# Allegro board H3_PROTOTYPE_DDR3_16X2_V3_0_20141112D.brd
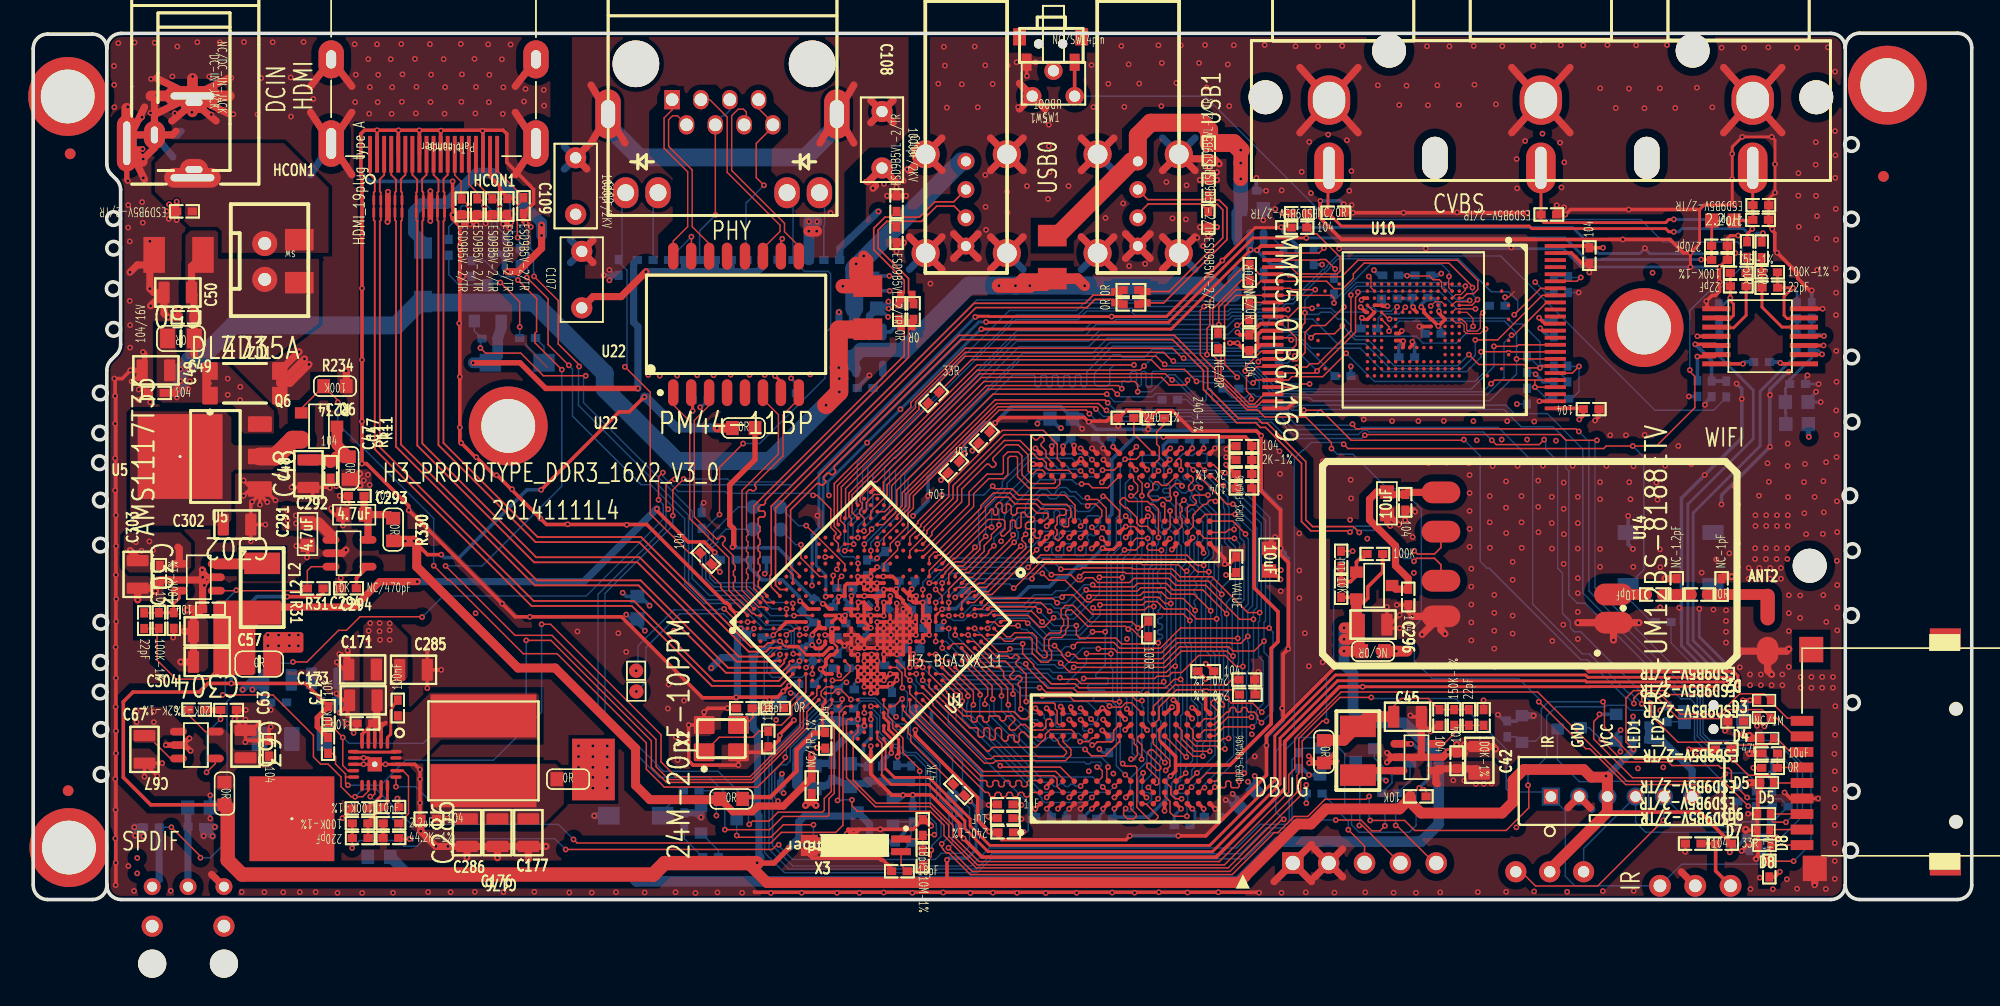
[diagram p0: board, top side]
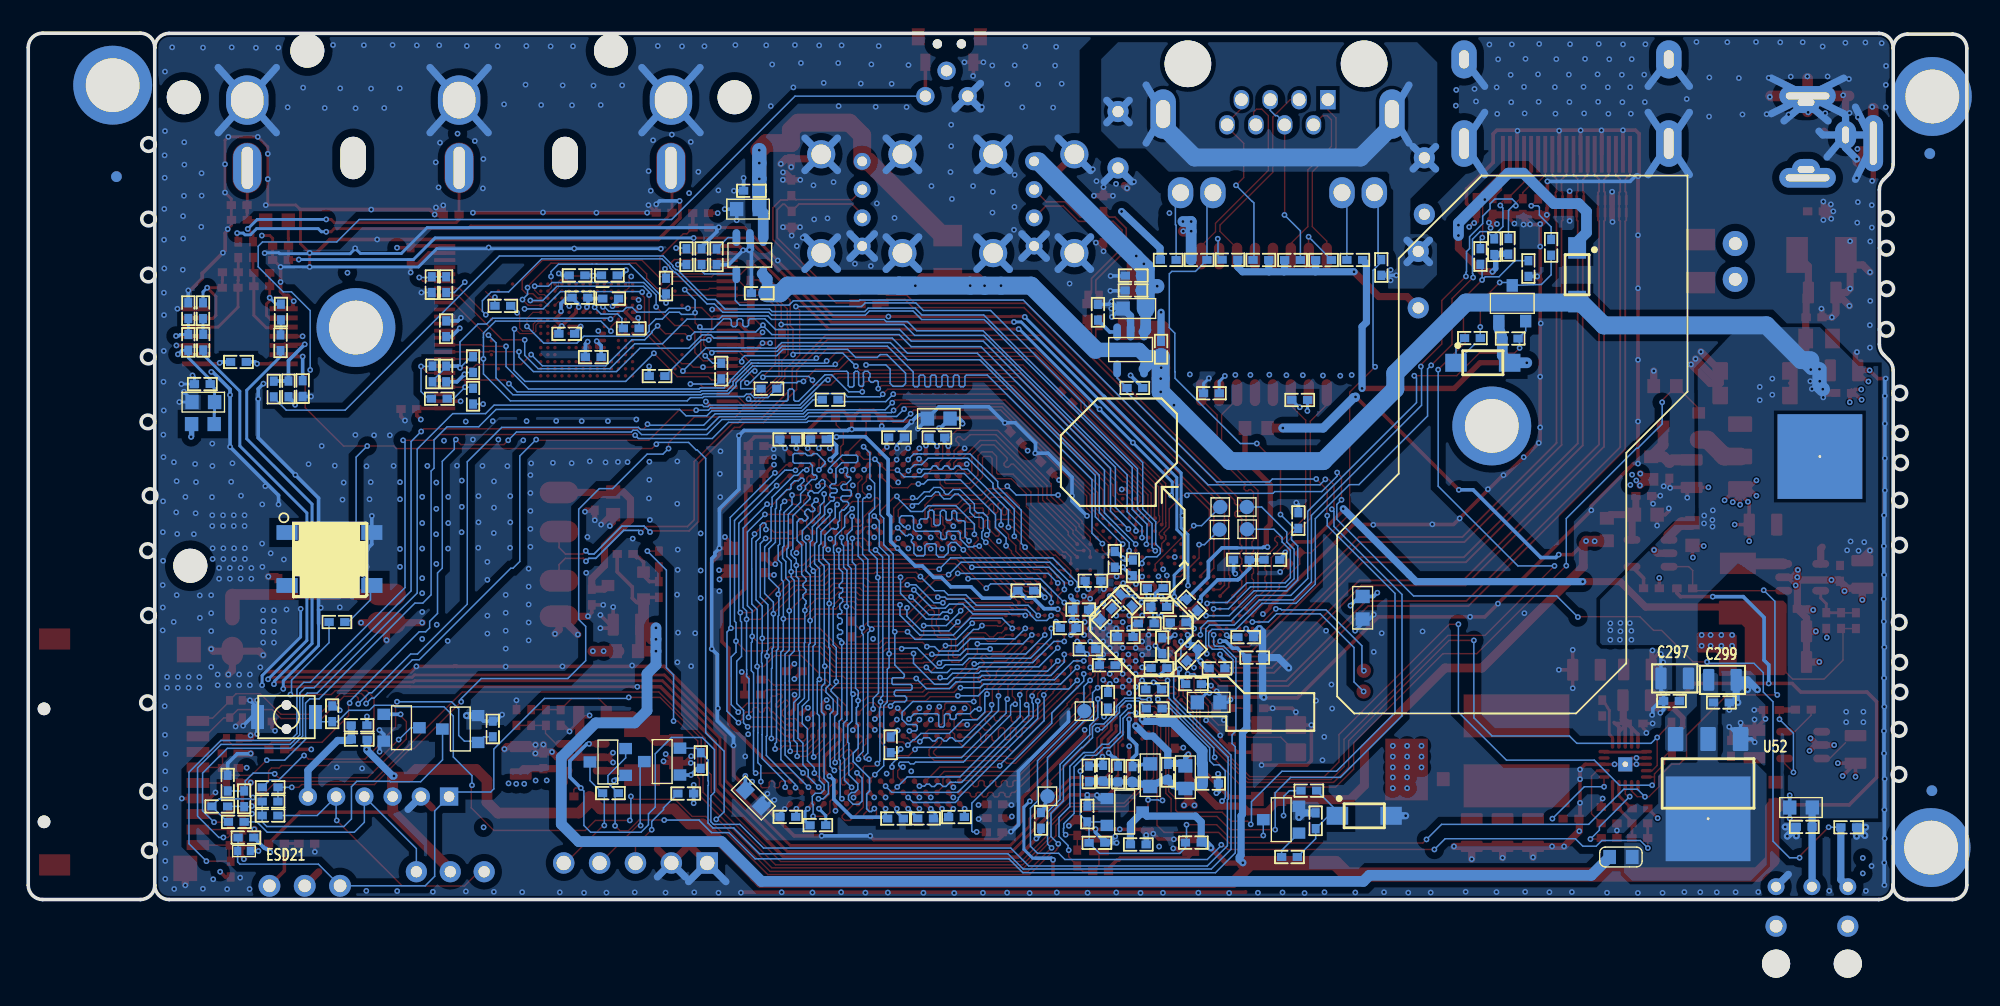
[diagram p1: board, bottom side, seen from below]

Outline 137.27 x 61.36 mm; copper layers: TOP, GND02, POWER03, BOTTOM. Coordinates in mm from the lower left corner of the outline.
Outline path: circle c4.69,30.94 r0.48 ; circle c4.71,33.04 r0.48 ; circle c4.74,14.7 r0.48 ; circle c4.74,35.88 r0.48 ; circle c4.75,16.8 r0.48 ; circle c4.75,28.29 r0.48 ; circle c4.76,25.1 r0.48 ; circle c4.79,19.64 r0.48 ; circle c4.8,12.05 r0.48 ; circle c4.81,8.86 r0.48 ; circle c5.67,43.27 r0.48 ; circle c5.69,48.23 r0.48 ; circle c5.69,46.13 r0.48 ; circle c5.7,40.38 r0.48 ; circle c128.64,28.6 r0.48 ; circle c128.7,3.48 r0.48 ; circle c128.75,48.2 r0.48 ; circle c128.75,53.48 r0.48 ; circle c128.75,20.12 r0.48 ; circle c128.76,44.23 r0.48 ; circle c128.77,38.42 r0.48 ; circle c128.8,33.83 r0.48 ; circle c128.81,7.66 r0.48 ; circle c128.82,24.71 r0.48 ; circle c128.82,13.94 r0.48 ; 5.21,0.92 5.21,0.96 ; 5.21,60.33 arc(5.51,61.05) 6.23,61.35 127.29,61.35 arc(128.01,61.05) 128.31,60.33 ; 5.21,1.02 5.21,37.49 arc(5.29,37.88) 5.51,38.21 5.9,38.59 arc(6.12,38.92) 6.19,39.31 6.19,50.27 arc(6.12,50.66) 5.9,50.99 5.51,51.38 arc(5.29,51.71) 5.21,52.1 5.21,60.28 arc(4.92,61) 4.2,61.3 1.02,61.3 arc(0.3,61) 0,60.28 0,1.02 arc(0.3,0.3) 1.02,0 4.2,0 arc(4.92,0.3) 5.22,1.02 ; 5.22,1.02 5.22,1.11 ; 5.21,1.02 arc(5.51,0.3) 6.23,0 127.29,0 arc(128.01,0.3) 128.31,1.02 ; 128.31,60.33 128.31,60.35 arc(128.61,61.07) 129.33,61.36 136.25,61.36 arc(136.97,61.07) 137.27,60.35 137.27,1.02 arc(136.97,0.3) 136.25,0 129.33,0 arc(128.61,0.3) 128.31,1.02 ; 128.31,60.33 128.31,1.02

## Design rules (mm)
net group EPHY-RX: nets EPHY-RXN EPHY-RXP
net group EPHY-TX: nets EPHY-TXN EPHY-TXP
net group HTX2: nets HTX2N HTX2P
net group N20732855: nets N20732855 N20732865
net group NRE: nets N20779991 NRE
net group PWR-LED: nets N21745537 PWR-LED
net group RX: nets N20822254 N20822256
net group STATUS-LED: nets N21745582 STATUS-LED
net group TX: nets N20822250 N20822252
net group USB3: nets USB-DM3 USB-DP3
net group USB-DM0: nets N20667309 USB-DM0
net group USB-DM1: nets N20518549 USB-DM1
net group USB-DP0: nets N20667301 USB-DP0
net group USB-DP1: nets N20518545 USB-DP1
net group VCC-IR: nets N21757117 VCC-IR
net group X24MO: nets N20772561 X24MO
net group DATA0: nets SDQ0 SDQ1 SDQ2 SDQ3 SDQ4 SDQ5 SDQ6 SDQ7 SDQM0 SDQS0N SDQS0P
net group DATA1: nets SDQ8 SDQ9 SDQ10 SDQ11 SDQ12 SDQ13 SDQ14 SDQ15 SDQM1 SDQS1N SDQS1P
net group DATA2: nets SDQ16 SDQ17 SDQ18 SDQ19 SDQ20 SDQ21 SDQ22 SDQ23 SDQM2 SDQS2N SDQS2P
net group DATA3: nets SDQ24 SDQ25 SDQ26 SDQ27 SDQ28 SDQ29 SDQ30 SDQ31 SDQM3 SDQS3N SDQS3P

## Placement (name value [footprint] x y rotation side)
ANT2  ANT  [ANT30]  122.82 18.74 270 top
C1  104  [C0402]  57.22 20.73 180 bottom
C2  104  [C0402]  54.84 17.31 315 bottom
C3  4.7uF  [C0402]  57.47 22.06 180 bottom
C4  104  [C0402]  56.08 11.27 90 top
C5  4.7uF  [C0402]  54.76 15.26 180 bottom
C6  104  [C0402]  53.09 16.37 0 bottom
C7  104  [C0402]  51.37 24.07 180 bottom
C8  104  [C0402]  54.86 20.87 225 bottom
C17  1uF  [C0402]  55.84 19.63 0 bottom
C18  104  [C0402]  56.97 17.98 90 bottom
C19  1uF  [C0402]  60.34 24.09 270 bottom
C20  104  [C0402]  59.05 23.49 270 bottom
C21  10uF  [C0603]  53.69 13.97 0 bottom
C22  1uF  [C0402]  57.2 16.39 0 bottom
C23  1uF  [C0402]  60.82 14.11 90 bottom
C24  104  [C0402]  60.86 16.59 180 bottom
C25  104  [C0402]  57.58 14.88 0 bottom
C26  10uF  [C0603]  42.78 20.67 90 bottom
C27  1uF  [C0402]  59.5 21.19 225 bottom
C28  1uF  [C0402]  59.59 18.6 180 bottom
C29  104  [C0402]  58.11 19.55 0 bottom
C30  104  [C0402]  60.95 20.21 135 bottom
C31  18pF  [C0402]  52.05 11.37 90 top
C32  10uF  [C0603]  57.83 8.81 90 bottom
C33  104  [C0402]  59.08 8.86 90 bottom
C34  4.7uF  [C0402]  61.16 8.95 90 bottom
C35  1uF  [C0402]  60.1 8.89 90 bottom
C36  104  [C0402]  50.43 17.13 0 bottom
C37  10uF  [C0603]  55.33 8.66 90 bottom
C38  104  [C0402]  56.58 9.02 90 bottom
C39  104  [C0402]  58.67 3.9 0 bottom
C40  104  [C0402]  62.28 6.06 270 bottom
C41  18pF  [C0402]  50.36 13.55 0 top
C42  10uF  [C0805]  102.4 9.86 90 top
C43  104  [C0402]  100.79 9.82 90 top
C44  22pF  [C0402]  101.66 12.89 90 top
C45  10uF  [C0805]  97.32 12.94 0 top
C46  104  [C0402]  99.58 12.89 270 top
C47  104  [C0402]  21.06 30.4 90 top
C48  10uF  [C0805]  19.49 30.17 90 top
C49  10uF  [C0805]  8.69 37.48 0 top
C50  10uF/16V  [C0805]  10.24 42.99 180 top
C51  104/16V  [C0402]  10.82 41.23 180 top
C55  104  [C0402]  8.97 23.1 270 top
C56  22pF  [C0402]  7.86 19.75 270 top
C57  22uF  [C0805]  12.32 18.99 180 top
C58  104  [C0402]  12.56 20.59 180 top
C62  104  [C0402]  16.7 10.71 270 top
C63  10uF  [C0805]  15.04 11.01 270 top
C67  10uF  [C0805]  7.88 10.63 90 top
C68  104  [C0402]  107.68 40.43 270 bottom
C69  104  [C0402]  110.19 45.61 90 top
C70  104  [C0402]  86.11 39.44 270 top
C71  104  [C0402]  110.32 34.74 180 top
C72  104  [C0402]  108.69 43.55 90 bottom
C75  1uF  [C0402]  99.14 40.07 0 bottom
C76  104  [C0402]  98.2 42.63 0 bottom
C77  1uF  [C0402]  96.03 42.56 180 bottom
C78  104  [C0402]  97.26 38.41 180 bottom
C79  1uF  [C0402]  90.66 45.53 90 bottom
C80  104  [C0402]  89.63 47.59 0 top
C81  10uF  [C0402]  122.97 10.35 0 top
C82  1uF  [C0402]  57.06 38.98 270 bottom
C83  104  [C0402]  59.04 43.14 180 bottom
C84  10uF  [C0603]  58.94 41.86 180 bottom
C85  104  [C0402]  85.5 42.94 180 bottom
C86  104  [C0402]  86.06 50.2 180 bottom
C87  10uF  [C0603]  86.3 48.9 180 bottom
C88  10pF  [C0402]  114.8 21.61 180 top
C89  10uF  [C0603]  95.85 28.06 90 top
C90  104  [C0402]  97.15 28.14 270 top
C91  NC-1.2pF  [C0402]  116.38 22.18 90 top
C92  NC-1pF  [C0402]  119.55 22.17 90 top
C93  22pF  [C0402]  120.73 43.44 180 top
C94  4.7uF  [C0402]  119.41 39.43 270 bottom
C95  1uF  [C0402]  122.38 38.08 0 bottom
C96  1uF  [C0402]  117.84 36.19 270 bottom
C97  10uF  [C0603]  124.87 35.23 180 bottom
C98  104  [C0402]  124.94 36.51 180 bottom
C99  4.7uF  [C0402]  124.88 39.48 270 bottom
C100  22pF  [C0402]  122.97 43.33 0 top
C101  270pF  [C0402]  119.4 46.3 180 top
C102  270pF  [C0402]  122.32 48.14 180 top
C103  NC/10uF  [C0603]  11.74 6.52 0 bottom
C104  104  [C0402]  117.55 3.96 0 top
C105  104  [C0402]  47.24 35.38 0 bottom
C106  104  [C0402]  53.49 35.86 0 bottom
C107  1000pF/2KV  [CAP_DIP_3X6]  38.84 43.91 270 top
C108  1000pF/2KV  [CAP_DIP_3X6]  60.1 53.81 270 top
C109  1000pF/2KV  [CAP_DIP_3X6]  38.41 50.54 270 top
C121  18pF  [C0402]  61.33 2 0 top
C130  18pF  [C0402]  62.99 5.1 270 top
C170  104  [C0402]  97.37 21.43 270 top
C171  10uF  [C0805]  23.32 16.3 180 top
C172  104  [C0402]  23.49 12.47 180 top
C173  10uF  [C0805]  23.38 14.11 180 top
C174  220pF  [C0402]  23.16 4.35 180 top
C175  104  [C0402]  28.02 5.73 0 top
C176  22uF  [C0805]  32.88 4.74 90 top
C177  22uF  [C0805]  35.06 4.74 90 top
C178  2.2uF  [C0402]  25.34 5.4 0 top
C179  10nF  [C0402]  23.14 6.45 0 top
C180  100nF  [C0402]  25.82 13.56 90 top
C284  104  [C0402]  8.72 35.88 0 top
C285  22uF  [C0805]  26.93 16.27 0 top
C286  10uF  [C0805]  30.72 4.74 90 top
C287  104  [C0402]  54.36 45.3 180 bottom
C288  104  [C0402]  41.46 44.77 90 bottom
C289  104  [C0402]  47.63 24.16 135 top
C290  104  [C0402]  47.33 26.84 270 bottom
C291  4.7uF  [C0603]  19.43 25.88 90 top
C292  4.7uF  [C0603]  22.73 27.26 0 top
C293  104  [C0402]  22.88 28.59 0 top
C294  NC/470pF  [C0402]  22.33 22.04 0 top
C295  1uF  [C0402]  92.62 21.96 90 top
C296  10uF  [C0805]  94.88 19.47 0 top
C297  10uF  [C0805]  20.68 15.66 180 bottom
C298  104  [C0402]  17.38 13.96 0 bottom
C299  10uF  [C0805]  17.31 15.56 0 bottom
C300  104  [C0402]  20.91 14.06 180 bottom
C301  NC/1uF  [C0402]  46.59 7.71 0 bottom
C302  10uF  [C0805]  14.43 26.56 180 top
C303  22uF  [C0805]  7.4 23.03 270 top
C304  22uF  [C0805]  12.33 16.83 180 top
C305  1uF  [C0402]  96.12 44.21 0 bottom
C306  104  [C0402]  98.41 44.21 180 bottom
D1  ESD9B5V-2/TR  [C0402]  10.72 48.74 180 top
D2  ESD9B5V-2/TR  [TVS0402]  122.56 14.11 180 top
D3  ESD9B5V-2/TR  [TVS0402]  122.55 12.88 180 top
D4  ESD9B5V-2/TR  [TVS0402]  122.78 11.42 180 top
D5  ESD9B5V-2/TR  [TVS0402]  122.77 8.28 180 top
D6  ESD9B5V-2/TR  [TVS0402]  122.56 6.08 180 top
D7  ESD9B5V-2/TR  [TVS0402]  122.52 4.9 180 top
D8  ESD9B5V-2/TR  [TVS0402]  122.6 3.84 180 top
D9  ESD9B5V-2/TR  [C0402]  59.03 44.19 0 bottom
D10  ESD9B5VL-2/TR  [C0402]  61.13 49.29 90 top
D11  ESD9B5VL-2/TR  [C0402]  61.13 47.09 270 top
D12  ESD9B5V-2/TR  [C0402]  83.24 53.03 270 top
D13  ESD9B5VL-2/TR  [C0402]  83.23 50.41 90 top
D14  ESD9B5VL-2/TR  [C0402]  83.21 48.18 270 top
D15  ESD9B5V-2/TR  [C0402]  107.32 48.52 180 top
D16  ESD9B5V-2/TR  [C0402]  92.24 48.65 180 top
D17  ESD9B5V-2/TR  [C0402]  122.33 49.18 180 top
D18  NC/ESD9B5V-2/TR  [C0402]  11.51 5.15 0 bottom
D30  NC/ESD9B5V-2/TR  [C0402]  8.36 5.12 180 bottom
D40  ESD9B5V-2/TR  [C0402]  30.35 49.06 270 top
D41  ESD9B5V-2/TR  [C0402]  33.57 49.09 270 top
D42  ESD9B5V-2/TR  [C0402]  32.51 49.07 270 top
D43  ESD9B5V-2/TR  [C0402]  34.72 49.15 270 top
D44  ESD9B5V-2/TR  [C0402]  31.44 49.08 270 top
D45  XBS104S14  [SOD123]  36.77 37.82 180 bottom
D46  XBS104S14  [SOD123]  27.8 46.75 270 bottom
D47  NC/ESD9B5V-2/TR  [C0402]  61.6 4.02 180 bottom
D48  NC/XBS104S14  [SOD123]  45.17 5.73 180 bottom
DC1  104  [C0402]  85.73 29.12 180 top
DC2  10uF  [C0603]  85.93 7.19 45 bottom
DC3  1uF  [C0402]  83.48 5.85 180 bottom
DC4  1uF  [C0402]  71.54 5.84 180 bottom
DC5  104  [C0402]  73.73 5.75 0 bottom
DC6  104  [C0402]  72.93 32.72 0 bottom
DC7  104  [C0402]  81.36 5.27 180 bottom
DC8  10uF  [C0603]  87.52 24.07 270 top
DC9  1uF  [C0402]  68.82 5.76 180 top
DC10  1uF  [C0402]  75.79 32.73 0 bottom
DC11  104  [C0402]  83.49 32.59 180 bottom
DC12  104  [C0402]  83.03 16.17 0 top
DC13  104  [C0402]  85.18 23.71 270 top
DC14  10uF  [C0603]  72.8 34.06 180 bottom
DC15  1uF  [C0402]  68.83 6.74 0 top
DC16  1uF  [C0402]  67.34 32.74 225 top
DC17  104  [C0402]  65.18 30.63 225 top
DC18  104  [C0402]  76.2 10.96 90 bottom
DC19  104  [C0402]  75.86 5.74 0 bottom
DC20  104  [C0402]  85.73 32.12 0 top
DC21  104  [C0402]  66.64 21.88 0 bottom
DC22  104  [C0402]  81.32 32.59 180 bottom
DC23  104  [C0402]  63.63 19.23 180 bottom
DC24  104  [C0402]  61.88 22.58 0 bottom
DC25  1uF  [C0402]  62.75 20.54 0 bottom
DC27  1uF  [C0402]  62.23 17.72 0 bottom
DR1  240-1%  [R0402]  79.55 34.1 0 top
DR2  240-1%  [R0402]  77.38 34.11 0 top
DR3  240-1%  [R0402]  85.97 14.52 180 top
DR4  240-1%  [R0402]  85.94 15.58 180 top
DR5  240-1%  [R0402]  68.87 4.76 180 top
DR6  2K-1%  [R0402]  85.73 30.14 180 top
DR7  2K-1%  [R0402]  85.73 31.13 0 top
DR8  100R  [R0402]  78.96 19.16 270 top
DU1  DDR3-FBGA96  [FBGA96C80P9X13]  77.32 28.4 90 top
DU2  DDR3-FBGA96  [FBGA96C80P9X13]  77.32 9.99 90 top
ESD21  NC/ESD9B5V-2/TR  [TVS0402]  121.99 3.44 180 bottom
FB1  0R  [L0603]  124.9 33.68 0 bottom
HCON1  HDMI_19plug type A  [HDMI-CON-HOLE]  28.35 64.1 180 top
J1  DC-IN-JACK  [DC-508]  11.13 50.77 270 top
J2  MICROSD/TF_SLOT  [TF9P]  136.15 10.45 90 top
J4  NC/SIP-7  [OPTICAL_JACK]  8.43 0.91 180 top
J6  CON2  [CON5]  99.35 2.59 180 top
J7  AV3-8.4-5  [RCA-316]  106.76 55.97 180 top
J8  RJ45A  [RJ-45B]  48.81 55.88 180 top
J9  CON6  [HDR6P2_00]  112.47 7.49 0 top
J10  NC/DC-IN-JACK  [DC-208]  11.39 51.7 270 top
L1  4.7uH@1.5A DCR<0.1R  [CD32]  93.8 10.54 90 top
L2  2.2uH@2A DCR<0.1R  [CD32]  16.21 22.09 270 top
L4  2.2uH  [L0603]  119.66 48.09 0 top
L5  2.2uH-6A  [CD75]  31.88 10.53 0 top
L13  NC/EXC14CE900U  [ESD4P0_8B1_6X3_0]  61.83 41.72 270 top
L14  NC/EXC14CE900U  [ESD4P0_8B1_6X3_0]  77.73 42.66 180 top
LED2  RED-BLUE-DUAL-LED-CA  [LED3P2_4B8_1X12_1]  107.39 1.97 0 top
NOREF  -  [unnamed]  2.44 56.88 0 top
NOREF#2  -  [unnamed#2]  2.62 52.82 0 top
NOREF#3  -  [unnamed#2]  2.48 7.71 0 top
NOREF#4  -  [unnamed]  2.53 3.68 0 top
NOREF#5  -  [#3]  5.19 60.34 0 top
NOREF#6  -  [unnamed#3]  125.79 23.64 0 top
NOREF#7  -  [unnamed]  114.07 40.51 0 top
NOREF#8  -  [#3]  -0.02 50.82 0 top
NOREF#9  -  [unnamed]  33.64 33.54 0 top
NOREF#10  -  [unnamed]  131.29 57.68 315 top
NOREF#11  -  [#3]  124.32 0.02 90 top
NOREF#12  -  [unnamed#2]  131.02 51.22 315 top
NOREF#13  -  [unnamed#2]  131.02 51.2 135 bottom
NOREF#14  -  [unnamed#2]  2.47 7.71 180 bottom
NOREF#15  -  [unnamed#2]  2.62 52.84 180 bottom
OC1  22uF-10V  [C1210]  10.29 45.66 180 top
P1  -  [USB_A_1]  66.05 46.28 180 top
P2  -  [USB_A_1]  78.22 46.28 180 top
Q2  NC-BSN20  [SOT-23]  96.22 9.74 0 bottom
Q3  BSN20  [SOT-23]  92.38 9.77 0 bottom
Q4  AO3423-PMOS  [SOT-23]  94.95 22.24 0 top
Q5  NC/MMBT3904  [SOT-23]  106.67 12.08 0 bottom
Q6  AO3423-PMOS  [SOT-23]  20.24 33.52 0 top
Q7  BSN20  [SOT-23]  32.19 42.23 90 bottom
Q8  NC/MMBT3904  [SOT-23]  110.84 12.17 180 bottom
Q9  NC/MMBT3904  [SOT-23]  48.55 5.65 0 bottom
R2  0R  [R0402]  65.56 5.61 270 bottom
R3  47K  [R0402]  65.54 7.77 135 top
R5  10K  [R0402]  54.77 4.03 180 bottom
R6  NC/1R-1%  [R0402]  55.13 8.07 90 top
R7  220K-1%  [R0402]  62.17 8.9 90 bottom
R8  0R  [R0402]  52.58 13.56 0 top
R9  0R  [R0402]  53.55 8.21 0 bottom
R10  0R  [R0603]  91.39 10.47 270 top
R11  0R  [R0603]  22.34 30.56 270 top
R12  150K-1%  [R0402]  100.62 12.89 90 top
R13  0R  [R0805]  10.46 39.74 180 top
R14  100K-1%  [R0402]  102.7 12.89 270 top
R16  100K-1%  [R0402]  8.9 19.76 270 top
R18  100K-1%  [R0402]  9.95 19.76 90 top
R20  NC/0R  [R0603]  94.88 17.59 180 top
R21  0R  [R0805]  16.01 16.68 0 top
R24  2R-1%  [R0402]  49.21 24.06 0 bottom
R25  0R  [R0603]  13.55 7.51 270 top
R27  62K-1%  [R0402]  11.58 13.45 180 top
R29  20K-1%  [R0402]  13.84 13.43 180 top
R31  10K  [R0402]  19.97 22.04 0 top
R32  10K  [R0402]  98.07 7.31 180 top
R33  0R  [R0603]  49.44 7.13 0 top
R34  0R  [R0603]  50.31 33.4 0 top
R35  10K  [R0402]  105.77 35.65 90 bottom
R36  0R-NC  [R0402]  108.16 35.47 0 bottom
R37  10K  [R0402]  107.68 43.55 90 bottom
R38  NC/0R  [R0402]  92.74 37.07 180 bottom
R39  NC/0R  [R0402]  108.64 37.23 270 bottom
R41  10K  [R0402]  105.77 37.89 90 bottom
R43  33R  [R0402]  63.76 35.55 45 top
R44  NC/0R  [R0402]  84.82 36.18 0 bottom
R45  NC/0R  [R0402]  86.11 41.63 90 top
R46  NC/0R  [R0402]  92.11 43.45 90 bottom
R47  NC/0R  [R0402]  88.2 37.43 270 bottom
R48  NC/0R  [R0402]  83.9 39.56 270 top
R49  NC/0R  [R0402]  86.14 44.41 270 top
R50  0R  [R0402]  122.95 9.32 0 top
R51  47K  [R0402]  119.67 10.63 0 top
R52  47K  [R0402]  122.93 2.16 90 top
R53  33R  [R0402]  80.49 35.4 0 bottom
R54  NC/1M  [R0402]  120.56 12.61 0 top
R55  100K  [R0402]  58.91 36.24 0 bottom
R56  6K8-1%  [R0402]  61.53 41.6 270 bottom
R57  100K  [R0402]  89.59 45.53 270 bottom
R58  6K8-1%  [R0402]  88.53 45.53 90 bottom
R59  0R  [R0402]  117.97 21.6 0 top
R60  100K-1%  [R0402]  120.73 44.39 180 top
R61  49.9K-1%  [R0402]  119.37 41.61 270 bottom
R62  50R  [R0402]  121.36 46.03 270 top
R63  4.7K  [R0402]  119.89 36.16 90 bottom
R64  4.7K  [R0402]  118.84 36.17 90 bottom
R65  3K  [R0402]  125.94 39.46 90 bottom
R66  2K  [R0402]  125.94 41.71 90 bottom
R67  49.9K-1%  [R0402]  124.89 41.7 270 bottom
R68  100K-1%  [R0402]  122.96 44.43 0 top
R69  50R  [R0402]  122.39 46.02 270 top
R70  75R-1%  [R0402]  119.41 45.3 0 top
R77  47K  [R0402]  115.75 13.15 90 bottom
R78  47K  [R0402]  115.41 19.66 0 bottom
R79  33R  [R0402]  119.69 3.96 0 top
R80  10K  [R0402]  121.85 4.39 180 bottom
R83  330R  [R0402]  43.34 45.3 0 bottom
R84  330R  [R0402]  56.55 45.3 180 bottom
R85  75R  [R0402]  45.55 45.3 0 bottom
R86  75R  [R0402]  47.75 45.3 0 bottom
R87  75R  [R0402]  49.99 45.3 180 bottom
R88  75R  [R0402]  52.18 45.32 180 bottom
R90  0R  [R0402]  96.05 7.53 0 bottom
R91  10K  [R0402]  89.64 9.85 90 bottom
R92  NC  [R0402]  90.71 7.51 0 bottom
R97  6K-1%  [R0402]  51.06 18.58 0 bottom
R99  NC/0R  [R0402]  89.66 48.62 0 top
R175  NC-0R  [R1206]  59.11 41.93 270 top
R176  0R  [R0402]  61.32 41.65 270 top
R226  100K  [R0402]  95 24.48 0 top
R227  10K  [R0402]  20.88 10.92 90 top
R228  10K  [R0402]  20.91 13.11 90 top
R229  100K-1%  [R0402]  23.15 5.4 180 top
R230  100K-1%  [R0402]  25.33 6.55 180 top
R231  0R  [R0603]  37.88 8.52 0 top
R232  44.2K-1%  [R0402]  25.33 4.36 0 top
R234  100K  [R0603]  21.37 36.36 180 top
R236  10M-1%  [R0402]  62.99 2.94 270 top
R306  0R  [R0402]  29.43 46.2 270 bottom
R307  20K  [R0402]  34.44 45.54 90 bottom
R308  27K  [R0402]  31.04 44.69 270 bottom
R309  1K8  [R0402]  33.46 46.24 270 bottom
R310  1K8  [R0402]  32.46 46.27 270 bottom
R311  27K  [R0402]  35.01 39.77 180 bottom
R312  27K  [R0402]  32.33 39.74 0 bottom
R320  NC/100K  [R0402]  123.15 8.24 90 bottom
R321  NC/100K  [R0402]  104.38 12.08 90 bottom
R322  330R  [R0402]  122.54 5.5 0 bottom
R323  330R  [R0402]  120.15 5.95 0 bottom
R324  NC/10K  [R0402]  121.98 7.13 90 bottom
R325  NC/10K  [R0402]  120.14 7.95 0 bottom
R326  0R  [R0402]  123.71 6.59 0 bottom
R327  0R  [R0402]  120.15 6.94 0 bottom
R328  0R  [R0402]  113.83 11.33 180 bottom
R329  NC/0R  [R0402]  113.85 12.34 0 bottom
R330  0R  [R0603]  25.49 26.21 270 top
R331  NC/0R  [R1206]  18.85 45.22 270 top
R332  NC-0R  [R1206]  72.17 45.51 270 top
R333  0R  [R0402]  62.34 41.65 270 top
R334  0R  [R0402]  77.73 43.17 180 top
R335  0R  [R0402]  77.73 42.15 180 top
R337  10K  [R0402]  92.62 24.12 270 top
R339  0R  [R0603]  24.49 3.01 0 bottom
R340  NC/10K  [R0402]  46.11 5.58 270 bottom
R341  10K  [R0402]  107.68 37.23 90 bottom
R342  NC  [R0402]  103.67 42.05 180 bottom
R343  NC  [R0402]  94.57 40.45 0 bottom
R344  100K  [R0402]  57.54 13.53 0 bottom
R345  NC/10K  [R0402]  47.96 3.01 180 bottom
SW1  NC/UBOOT  [SW_3P_DIP_SHORT]  72.25 57.8 180 top
SW2  UBOOT  [SW4-SKQG-5_2X5_2H1_5B]  115.94 24.12 180 bottom
TP1  VDD-CPUFB  [TP_SMD]  62.48 13.34 180 bottom
TP2  GND-CPUFB  [TP_SMD]  65.1 7.31 180 bottom
TP3  JTAG-SEL0  [TP_SMD]  42.69 16.21 0 top
TP4  JTAG-SEL1  [TP_SMD]  42.71 14.73 0 top
TP5  CPUX-TDI  [TP_SMD]  52.87 27.8 0 bottom
TP6  CPUX-TCK  [TP_SMD]  50.99 27.8 0 bottom
TP7  CPUX-TDO  [TP_SMD]  50.96 26.23 0 bottom
TP8  CPUX-TMS  [TP_SMD]  52.92 26.2 0 bottom
U1  H3-BGA3XX_11  [BGA347P0_65B14X14]  59.31 19.66 45 top
U3  SGM803Z  [SOT-23]  59.63 6.2 180 bottom
U4  SY8008B  [SOT23-5]  97.95 10.08 0 top
U5  AMS1117T33  [SOT-223]  12.9 31.38 90 top
U7  SY8089A  [SOT23-5]  11.72 22.82 180 top
U8  AP2127  [SOT23-5]  11.52 10.94 0 top
U10  EMMC5_0_BGA169  [BGA169P0_50B12_00X16_00H1_00]  97.73 40.34 270 top
U11  NC-NAND FLASH X8  [TSOP-48]  97.78 40.54 180 top
U12  SY6280  [SOT23-5]  59.22 38.95 270 bottom
U13  SY6280  [SOT23-5]  86.17 45.64 270 bottom
U14  RL-UM12BS-8188ETV  [SOP6P2_00B12_96X_22]  105.79 23.63 90 top
U15  SGM89000  [TSSOP14]  122.29 39.89 0 top
U19  rRClamp0524P  [RCLAMP0524P]  24.11 49.54 0 top
U20  rRClamp0524P  [RCLAMP0524P]  27.12 49.54 0 top
U21  IR_MODULE  [IR3P2_50B7_00X3_50]  117.69 0.97 180 top
U22  PM44-11BP  [SOP16P1_27B6_86X12_70H6_0]  49.77 40.74 0 top
U31  SY8106A  [QFN21P0_45B3_00X3_00H0_90]  24.19 9.58 270 top
U48  KEY-2PIN  [SW3X4_2P]  118.98 12.93 0 bottom
U49  RT9050-33GB  [SOT23-5]  22.33 24.53 0 top
U50  sw  [XH-2-2_54]  16.4 45.19 270 top
U51  NC/SW_4pin  [KEY6P3_40]  72.12 60.62 0 top
U52  AMS1117T33  [SOT-223]  18.32 8.22 0 bottom
X2  24M-20pF-10PPM  [CRY-TSX3225]  48.72 11.39 90 top
X3  32768  [IN-CRYSTAL_0206H1_4A]  58.2 3.84 180 top
ZD1  DL4735A  [MELF5_00X2_80]  14.99 36.57 0 top

## Library data of the parts
ANT2 = ANT_0
C1-C8 C17-C41 C68-C72 C75-C80 C88-C92 C104 C121 C130 C170 C287-C290 C295 C296 C301 C305 C306 DC1-DC25 DC27 = CAPACITOR_0
C42-C46 C50 C51 C55-C58 C171-C173 C285 C303 C304 = CAPACITOR_1
C47-C49 C62 C63 C67 C81-C87 C93-C96 C99-C103 C174-C180 C284 C286 C291-C294 C297-C300 C302 = CAPACITOR
C97 C98 = CAP NP
C105-C109 = CAP_1
D1-D18 D30 D40-D44 D47 ESD21 = 1_1.5KE100A
D45 D48 = DIODE_SCHOTTKY_1: Tolerance: RichardLC
D46 = DIODE_SCHOTTKY_2: Tolerance: RichardLC
DR1-DR5 DR8 R3 R6 R7 R10-R14 R16 R18 R20 R21 R24 R25 R27 R29 R31-R39 R41 R44-R49 R51-R58 R60-R62 R65-R69 R79 R80 R99 R175 R227-R232 R236 R307 R320-R325 R329-R332 R339 R341-R344 = R
DR6 DR7 = ?_0
DU1 DU2 = DDR3_1: Tolerance: RichardLC
FB1 = INDUCTOR_4
HCON1 = HDMI19_PLUG: User Part Number: Part number; Tolerance: Toleance
J1 J10 = PHONEJack_DCIN_0
J2 = SDMMC SLOT_11
J4 = SIP-7
J6 J9 = CON2_2
J7 = HEADER_1x4-2mm_0
J8 = LU1S041A_0
L1 L2 = INDUCTOR_1
L4 = INDUCTOR
L5 = INDUCTOR_5
L13 L14 = R-PACK4_1
LED2 = LED_1
OC1 = CAPACITOR_POL_0
P1 P2 = USB_A_1
Q2 Q3 Q7 = NMOS_0
Q4 Q6 = PMOS_0
Q5 Q8 Q9 = NPN
R2 R8 R9 R50 R59 R176 R326-R328 R333-R335 = R: signal model: R_R0402_0R_0R
R5 R63 R64 R77 R78 R340 R345 = R1 0805
R43 = R: signal model: R_R0402_33R_33R
R70 = RESISTOR: room: TVLCD
R83-R88 R97 R226 R234 R337 = R1_0805
R90-R92 = R1_0805: room: DRAM
R306 R308-R312 = RESISTOR
SW1 = SW-_0
SW2 = SW_PUSH: User Part Number: PRAT NUMBER; Tolerance: TOLERANCE
TP1-TP8 = T_POINT_R
U1 = H3-BGA3XX_12
U3 = MAX809RD_0
U4 U7 = SY8088
U5 U52 = AMS1117T33_2: Tolerance: RichardLC
U8 = uP0107_0
U10 = EMMC5_0_BGA169: Tolerance: RichardLC
U11 = NAND_FLASH_X8
U12 U13 = RT9266PE_2
U14 = MINI USB-B_5
U15 = SGM8900
U19 U20 = rRClamp0524P
U21 = IR_Module_0
U22 = J_0
U31 = SY8106a_0
U48 = KEY-2PIN
U49 = RT9050
U50 = sw
U51 = SW_4pin
X2 = CRYSTAL-4_0
X3 = CRYSTAL_XCOL-3_2: User Part Number: Part number; Tolerance: Toleance
ZD1 = DIODE_SCHOTTKY_3

## Footprints (pads in the part's own frame, mm; a bottom-side part is the same pattern mirrored in y, then rotated)
ANT30
  oval 2.6x1.02 smd: 1(-1.981,0)
  oval 2.032x1.524 smd: 2(1.143,0)
BGA169P0_50B12_00X16_00H1_00
  round 0.249 smd: A4(-1.75,6.749) A6(-0.749,6.749) A9(0.749,6.749) A11(1.75,6.749) AA1(-3.251,-3.251) AA2(-2.751,-3.251) AA3(-2.25,-3.251) AA4(-1.75,-3.251) AA5(-1.25,-3.251) AA6(-0.749,-3.251) AA7(-0.249,-3.251) AA8(0.249,-3.251) AA9(0.749,-3.251) AA10(1.25,-3.251) AA11(1.75,-3.251) AA12(2.25,-3.251) AA13(2.751,-3.251) AA14(3.251,-3.251) AE1(-3.251,-5.25) AE14(3.251,-5.25) AG2(-2.751,-6.251) AG13(2.751,-6.251) AH4(-1.75,-6.749) AH6(-0.749,-6.749) AH9(0.749,-6.749) AH11(1.75,-6.749) B2(-2.751,6.251) B13(2.751,6.251) D1(-3.251,5.25) D14(3.251,5.25) H1(-3.251,3.251) H2(-2.751,3.251) H3(-2.25,3.251) H4(-1.75,3.251) H5(-1.25,3.251) H6(-0.749,3.251) H7(-0.249,3.251) H8(0.249,3.251) H9(0.749,3.251) H10(1.25,3.251) H11(1.75,3.251) H12(2.25,3.251) H13(2.751,3.251) H14(3.251,3.251) J1(-3.251,2.751) J2(-2.751,2.751) J3(-2.25,2.751) J4(-1.75,2.751) J5(-1.25,2.751) J6(-0.749,2.751) J7(-0.249,2.751) J8(0.249,2.751) J9(0.749,2.751) J10(1.25,2.751) J11(1.75,2.751) J12(2.25,2.751) J13(2.751,2.751) J14(3.251,2.751) K1(-3.251,2.25) K2(-2.751,2.25) K3(-2.25,2.25) K4(-1.75,2.25) K5(-1.25,2.25) K6(-0.749,2.25) K7(-0.249,2.25) K8(0.249,2.25) K9(0.749,2.25) K10(1.25,2.25) K11(1.75,2.25) K12(2.25,2.25) K13(2.751,2.25) K14(3.251,2.25) L1(-3.251,1.75) L2(-2.751,1.75) L3(-2.25,1.75) L4(-1.75,1.75) L12(2.25,1.75) L13(2.751,1.75) L14(3.251,1.75) M1(-3.251,1.25) M2(-2.751,1.25) M3(-2.25,1.25) M5(-1.25,1.25) M6(-0.749,1.25) M7(-0.249,1.25) M8(0.249,1.25) M9(0.749,1.25) M10(1.25,1.25) M12(2.25,1.25) M13(2.751,1.25) M14(3.251,1.25) N1(-3.251,0.749) N2(-2.751,0.749) N3(-2.25,0.749) N5(-1.25,0.749) N10(1.25,0.749) N12(2.25,0.749) N13(2.751,0.749) N14(3.251,0.749) P1(-3.251,0.249) P2(-2.751,0.249) P3(-2.25,0.249) P5(-1.25,0.249) P10(1.25,0.249) P12(2.25,0.249) P13(2.751,0.249) P14(3.251,0.249) R1(-3.251,-0.249) R2(-2.751,-0.249) R3(-2.25,-0.249) R5(-1.25,-0.249) R10(1.25,-0.249) R12(2.25,-0.249) R13(2.751,-0.249) R14(3.251,-0.249) T1(-3.251,-0.749) T2(-2.751,-0.749) T3(-2.25,-0.749) T5(-1.25,-0.749) T10(1.25,-0.749) T12(2.25,-0.749) T13(2.751,-0.749) T14(3.251,-0.749) U1(-3.251,-1.25) U2(-2.751,-1.25) U3(-2.25,-1.25) U5(-1.25,-1.25) U6(-0.749,-1.25) U7(-0.249,-1.25) U8(0.249,-1.25) U9(0.749,-1.25) U10(1.25,-1.25) U12(2.25,-1.25) U13(2.751,-1.25) U14(3.251,-1.25) V1(-3.251,-1.75) V2(-2.751,-1.75) V3(-2.25,-1.75) V12(2.25,-1.75) V13(2.751,-1.75) V14(3.251,-1.75) W1(-3.251,-2.25) W2(-2.751,-2.25) W3(-2.25,-2.25) W4(-1.75,-2.25) W5(-1.25,-2.25) W6(-0.749,-2.25) W7(-0.249,-2.25) W8(0.249,-2.25) W9(0.749,-2.25) W10(1.25,-2.25) W11(1.75,-2.25) W12(2.25,-2.25) W13(2.751,-2.25) W14(3.251,-2.25) Y1(-3.251,-2.751) Y2(-2.751,-2.751) Y3(-2.25,-2.751) Y4(-1.75,-2.751) Y5(-1.25,-2.751) Y6(-0.749,-2.751) Y7(-0.249,-2.751) Y8(0.249,-2.751) Y9(0.749,-2.751) Y10(1.25,-2.751) Y11(1.75,-2.751) Y12(2.25,-2.751) Y13(2.751,-2.751) Y14(3.251,-2.751)
BGA347P0_65B14X14
  round 0.279 smd: A1(-6.5,6.5) A2(-5.85,6.5) A3(-5.199,6.5) A4(-4.549,6.5) A5(-3.899,6.5) A7(-2.601,6.5) A8(-1.951,6.5) A10(-0.65,6.5) A11(0,6.5) A13(1.3,6.5) A14(1.951,6.5) A16(3.251,6.5) A17(3.899,6.5) A19(5.199,6.5) A20(5.85,6.5) A21(6.5,6.5) AA1(-6.5,-6.5) AA2(-5.85,-6.5) AA3(-5.199,-6.5) AA5(-3.899,-6.5) AA6(-3.251,-6.5) AA8(-1.951,-6.5) AA9(-1.3,-6.5) AA11(0,-6.5) AA12(0.65,-6.5) AA14(1.951,-6.5) AA15(2.601,-6.5) AA17(3.899,-6.5) AA18(4.549,-6.5) AA19(5.199,-6.5) AA20(5.85,-6.5) AA21(6.5,-6.5) B1(-6.5,5.85) B2(-5.85,5.85) B3(-5.199,5.85) B4(-4.549,5.85) B5(-3.899,5.85) B6(-3.251,5.85) B7(-2.601,5.85) B8(-1.951,5.85) B9(-1.3,5.85) B10(-0.65,5.85) B11(0,5.85) B12(0.65,5.85) B13(1.3,5.85) B14(1.951,5.85) B15(2.601,5.85) B16(3.251,5.85) B17(3.899,5.85) B18(4.549,5.85) B19(5.199,5.85) B20(5.85,5.85) B21(6.5,5.85) C1(-6.5,5.199) C2(-5.85,5.199) C3(-5.199,5.199) C5(-3.899,5.199) C6(-3.251,5.199) C7(-2.601,5.199) C8(-1.951,5.199) C9(-1.3,5.199) C10(-0.65,5.199) C11(0,5.199) C12(0.65,5.199) C13(1.3,5.199) C14(1.951,5.199) C15(2.601,5.199) C16(3.251,5.199) C17(3.899,5.199) C18(4.549,5.199) C19(5.199,5.199) C20(5.85,5.199) C21(6.5,5.199) D1(-6.5,4.549) D2(-5.85,4.549) D3(-5.199,4.549) D5(-3.899,4.549) D6(-3.251,4.549) D8(-1.951,4.549) D10(-0.65,4.549) D11(0,4.549) D13(1.3,4.549) D15(2.601,4.549) D17(3.899,4.549) D19(5.199,4.549) D20(5.85,4.549) E2(-5.85,3.899) E3(-5.199,3.899) E8(-1.951,3.899) E10(-0.65,3.899) E11(0,3.899) E13(1.3,3.899) E14(1.951,3.899) E15(2.601,3.899) E16(3.251,3.899) E18(4.549,3.899) E19(5.199,3.899) E20(5.85,3.899) E21(6.5,3.899) F1(-6.5,3.251) F2(-5.85,3.251) F3(-5.199,3.251) F5(-3.899,3.251) F6(-3.251,3.251) F7(-2.601,3.251) F8(-1.951,3.251) F10(-0.65,3.251) F11(0,3.251) F13(1.3,3.251) F14(1.951,3.251) F16(3.251,3.251) F17(3.899,3.251) F18(4.549,3.251) F19(5.199,3.251) F20(5.85,3.251) F21(6.5,3.251) G1(-6.5,2.601) G2(-5.85,2.601) G4(-4.549,2.601) G5(-3.899,2.601) G7(-2.601,2.601) G8(-1.951,2.601) G9(-1.3,2.601) G10(-0.65,2.601) G11(0,2.601) G12(0.65,2.601) G13(1.3,2.601) G14(1.951,2.601) G15(2.601,2.601) G18(4.549,2.601) G20(5.85,2.601) H2(-5.85,1.951) H3(-5.199,1.951) H4(-4.549,1.951) H6(-3.251,1.951) H7(-2.601,1.951) H8(-1.951,1.951) H10(-0.65,1.951) H11(0,1.951) H12(0.65,1.951) H13(1.3,1.951) H14(1.951,1.951) H15(2.601,1.951) H16(3.251,1.951) H17(3.899,1.951) H18(4.549,1.951) H19(5.199,1.951) H20(5.85,1.951) H21(6.5,1.951) J1(-6.5,1.3) J2(-5.85,1.3) J3(-5.199,1.3) J6(-3.251,1.3) J7(-2.601,1.3) J8(-1.951,1.3) J9(-1.3,1.3) J10(-0.65,1.3) J11(0,1.3) J12(0.65,1.3) J13(1.3,1.3) J14(1.951,1.3) J15(2.601,1.3) J16(3.251,1.3) J19(5.199,1.3) J20(5.85,1.3) J21(6.5,1.3) K1(-6.5,0.65) K2(-5.85,0.65) K3(-5.199,0.65) K4(-4.549,0.65) K6(-3.251,0.65) K7(-2.601,0.65) K8(-1.951,0.65) K9(-1.3,0.65) K10(-0.65,0.65) K11(0,0.65) K12(0.65,0.65) K13(1.3,0.65) K14(1.951,0.65) K15(2.601,0.65) K16(3.251,0.65) K17(3.899,0.65) K18(4.549,0.65) K20(5.85,0.65) L2(-5.85,0) L5(-3.899,0) L8(-1.951,0) L9(-1.3,0) L10(-0.65,0) L11(0,0) L12(0.65,0) L13(1.3,0) L14(1.951,0) L15(2.601,0) L16(3.251,0) L17(3.899,0) L18(4.549,0) L19(5.199,0) L20(5.85,0) L21(6.5,0) M1(-6.5,-0.65) M2(-5.85,-0.65) M3(-5.199,-0.65) M4(-4.549,-0.65) M5(-3.899,-0.65) M6(-3.251,-0.65) M7(-2.601,-0.65) M8(-1.951,-0.65) M9(-1.3,-0.65) M10(-0.65,-0.65) M11(0,-0.65) M12(0.65,-0.65) M13(1.3,-0.65) M14(1.951,-0.65) M15(2.601,-0.65) M16(3.251,-0.65) M19(5.199,-0.65) M20(5.85,-0.65) M21(6.5,-0.65) N1(-6.5,-1.3) N2(-5.85,-1.3) N3(-5.199,-1.3) N7(-2.601,-1.3) N8(-1.951,-1.3) N9(-1.3,-1.3) N10(-0.65,-1.3) N11(0,-1.3) N12(0.65,-1.3) N13(1.3,-1.3) N14(1.951,-1.3) N15(2.601,-1.3) N16(3.251,-1.3) N17(3.899,-1.3) N19(5.199,-1.3) N20(5.85,-1.3) P2(-5.85,-1.951) P3(-5.199,-1.951) P6(-3.251,-1.951) P7(-2.601,-1.951) P8(-1.951,-1.951) P9(-1.3,-1.951) P10(-0.65,-1.951) P11(0,-1.951) P12(0.65,-1.951) P13(1.3,-1.951) P14(1.951,-1.951) P15(2.601,-1.951) P16(3.251,-1.951) P17(3.899,-1.951) P19(5.199,-1.951) P20(5.85,-1.951) P21(6.5,-1.951) R1(-6.5,-2.601) R2(-5.85,-2.601) R6(-3.251,-2.601) R7(-2.601,-2.601) R8(-1.951,-2.601) R9(-1.3,-2.601) R10(-0.65,-2.601) R11(0,-2.601) R12(0.65,-2.601) R13(1.3,-2.601) R14(1.951,-2.601) R16(3.251,-2.601) R17(3.899,-2.601) R18(4.549,-2.601) R19(5.199,-2.601) R20(5.85,-2.601) R21(6.5,-2.601) T2(-5.85,-3.251) T3(-5.199,-3.251) T4(-4.549,-3.251) T5(-3.899,-3.251) T6(-3.251,-3.251) T7(-2.601,-3.251) T8(-1.951,-3.251) T9(-1.3,-3.251) T10(-0.65,-3.251) T11(0,-3.251) T12(0.65,-3.251) T13(1.3,-3.251) T14(1.951,-3.251) T15(2.601,-3.251) T16(3.251,-3.251) T17(3.899,-3.251) T18(4.549,-3.251) T20(5.85,-3.251) U2(-5.85,-3.899) U3(-5.199,-3.899) U4(-4.549,-3.899) U6(-3.251,-3.899) U9(-1.3,-3.899) U11(0,-3.899) U15(2.601,-3.899) U16(3.251,-3.899) U18(4.549,-3.899) U19(5.199,-3.899) U20(5.85,-3.899) U21(6.5,-3.899) V1(-6.5,-4.549) V2(-5.85,-4.549) V3(-5.199,-4.549) V4(-4.549,-4.549) V5(-3.899,-4.549) V6(-3.251,-4.549) V10(-0.65,-4.549) V11(0,-4.549) V12(0.65,-4.549) V13(1.3,-4.549) V15(2.601,-4.549) V17(3.899,-4.549) V19(5.199,-4.549) V20(5.85,-4.549) V21(6.5,-4.549) W1(-6.5,-5.199) W2(-5.85,-5.199) W3(-5.199,-5.199) W5(-3.899,-5.199) W6(-3.251,-5.199) W9(-1.3,-5.199) W11(0,-5.199) W12(0.65,-5.199) W13(1.3,-5.199) W15(2.601,-5.199) W17(3.899,-5.199) W18(4.549,-5.199) W20(5.85,-5.199) W21(6.5,-5.199) Y1(-6.5,-5.85) Y2(-5.85,-5.85) Y3(-5.199,-5.85) Y4(-4.549,-5.85) Y7(-2.601,-5.85) Y8(-1.951,-5.85) Y9(-1.3,-5.85) Y10(-0.65,-5.85) Y11(0,-5.85) Y12(0.65,-5.85) Y13(1.3,-5.85) Y14(1.951,-5.85) Y15(2.601,-5.85) Y16(3.251,-5.85) Y17(3.899,-5.85) Y18(4.549,-5.85) Y19(5.199,-5.85) Y20(5.85,-5.85) Y21(6.5,-5.85)
C0402
  rect 0.66x0.559 smd: 1(-0.559,0) 2(0.559,0)
C0603
  rect 0.95x1.001 smd: 1(-0.8,0) 2(0.8,0)
C0805
  custom 0.798x1.549 smd: 1(-0.975,0) 2(0.975,0)
C1210
  rect 1.524x2.54 smd: 1(-1.727,0) 2(1.727,0)
CAP_DIP_3X6
  round 1.5 hole 0.8: 1(-2,0) 2(2,0)
CD32
  rect 1.524x2.54 smd: 1(-1.727,0) 2(1.727,0)
CD75
  rect 7.5x3.05 smd: 1(0,2.475) 2(0,-2.475)
CON5
  rect 1.524x1.524 hole 1.016: 1(10.16,0)
  round 1.524 hole 1.016: 2(7.62,0) 3(5.08,0) 4(2.54,0) 5(0,0)
CRY-TSX3225
  custom 1.27x1.468 smd: 1(-0.965,1.215) 2(-0.965,-1.215) 3(0.965,-1.215) 4(0.965,1.215)
DC-208
  oval 1.5x2 hole 0.5x1.2: 1(0,0) 2(-4.75,0)
  oval 2x1.5 hole 1.2x0.5: 3(-2.45,-2.8)
DC-508
  oval 1.4x4 hole 0.5x3.101: 1(-0.351,0.15) 3(-6.149,0.15)
  oval 4x1.4 hole 3.101x0.5: 2(-2.799,-4.501)
ESD4P0_8B1_6X3_0
  rect 0.8x0.5 smd: 1(-1,0.4) 2(-1,-0.4) 3(1,0.4) 4(1,-0.4)
FBGA96C80P9X13
  round 0.401 smd: A1(-3.2,5.999) A2(-2.4,5.999) A3(-1.6,5.999) A7(1.6,5.999) A8(2.4,5.999) A9(3.2,5.999) B1(-3.2,5.199) B2(-2.4,5.199) B3(-1.6,5.199) B7(1.6,5.199) B8(2.4,5.199) B9(3.2,5.199) C1(-3.2,4.399) C2(-2.4,4.399) C3(-1.6,4.399) C7(1.6,4.399) C8(2.4,4.399) C9(3.2,4.399) D1(-3.2,3.599) D2(-2.4,3.599) D3(-1.6,3.599) D7(1.6,3.599) D8(2.4,3.599) D9(3.2,3.599) E1(-3.2,2.799) E2(-2.4,2.799) E3(-1.6,2.799) E7(1.6,2.799) E8(2.4,2.799) E9(3.2,2.799) F1(-3.2,1.999) F2(-2.4,1.999) F3(-1.6,1.999) F7(1.6,1.999) F8(2.4,1.999) F9(3.2,1.999) G1(-3.2,1.199) G2(-2.4,1.199) G3(-1.6,1.199) G7(1.6,1.199) G8(2.4,1.199) G9(3.2,1.199) H1(-3.2,0.401) H2(-2.4,0.401) H3(-1.6,0.401) H7(1.6,0.401) H8(2.4,0.401) H9(3.2,0.401) J1(-3.2,-0.401) J2(-2.4,-0.401) J3(-1.6,-0.401) J7(1.6,-0.401) J8(2.4,-0.401) J9(3.2,-0.401) K1(-3.2,-1.199) K2(-2.4,-1.199) K3(-1.6,-1.199) K7(1.6,-1.199) K8(2.4,-1.199) K9(3.2,-1.199) L1(-3.2,-1.999) L2(-2.4,-1.999) L3(-1.6,-1.999) L7(1.6,-1.999) L8(2.4,-1.999) L9(3.2,-1.999) M1(-3.2,-2.799) M2(-2.4,-2.799) M3(-1.6,-2.799) M7(1.6,-2.799) M8(2.4,-2.799) M9(3.2,-2.799) N1(-3.2,-3.599) N2(-2.4,-3.599) N3(-1.6,-3.599) N7(1.6,-3.599) N8(2.4,-3.599) N9(3.2,-3.599) P1(-3.2,-4.399) P2(-2.4,-4.399) P3(-1.6,-4.399) P7(1.6,-4.399) P8(2.4,-4.399) P9(3.2,-4.399) R1(-3.2,-5.199) R2(-2.4,-5.199) R3(-1.6,-5.199) R7(1.6,-5.199) R8(2.4,-5.199) R9(3.2,-5.199) T1(-3.2,-5.999) T2(-2.4,-5.999) T3(-1.6,-5.999) T7(1.6,-5.999) T8(2.4,-5.999) T9(3.2,-5.999)
HDMI-CON-HOLE
  rect 0.279x2.601 smd: 1(4.501,11.311) 2(4,11.311) 3(3.5,11.311) 4(3,11.311) 5(2.499,11.311) 6(1.999,11.311) 7(1.501,11.311) 8(1.001,11.311) 9(0.5,11.311) 10(0,11.311) 11(-0.5,11.311) 12(-1.001,11.311) 13(-1.501,11.311) 14(-1.999,11.311) 15(-2.499,11.311) 16(-3,11.311) 17(-3.5,11.311) 18(-4,11.311) 19(-4.501,11.311)
  oval 1.801x3.299 hole 0.701x2.2: 20(-7.249,10.551) 21(7.249,10.551)
  oval 1.801x2.7 hole 0.701x1.3: 22(-7.249,4.59) 23(7.249,4.59)
HDR6P2_00
  rect 1.001x1.001 hole 0.752: 1(-4.999,-0.201)
  round 1.001 hole 0.752: 2(-3,-0.201) 3(-1.001,-0.201) 4(1.001,-0.201) 5(3,-0.201) 6(4.999,-0.201)
IN-CRYSTAL_0206H1_4A
  rect 1.4x0.5 smd: 1(-3.249,-0.45) 4(-3.249,0.45)
  rect 1.199x0.599 smd: 2(3.249,-0.45) 3(3.249,0.45)
IR3P2_50B7_00X3_50
  round 1.549 hole 0.899: 1(2.499,0) 2(0,0) 3(-2.499,0)
KEY6P3_40
  round 0.66 hole 0.66 unplated: (-0.923,-0.017) (0.777,-0.017)
  rect 0.711x1.219 smd: 1(-1.773,-1.317) 2(1.627,-1.317)
  rect 0.914x1.219 smd: 3(-2.273,0.483) 4(2.127,0.483)
L0603
  rect 0.95x1.001 smd: 1(-0.8,0) 2(0.8,0)
LED3P2_4B8_1X12_1
  round 1.501 hole 0.8: A1+(-2.4,0) A2+(2.4,0) C-(0,0)
MELF5_00X2_80
  custom 1.1x3 smd: A(2.47,0) C(-2.47,0)
OPTICAL_JACK
  round 1.999 hole 1.999 unplated: (-5.08,5.451) (0,5.451)
  round 1.199 hole 0.701: 1(0,0) 2(-2.54,0) 3(-5.08,0)
  round 1.501 hole 0.899: 4(0,2.799) 5(-5.08,2.799)
QFN21P0_45B3_00X3_00H0_90
  oval 0.8x0.249 smd: 1(-1.501,0.899) 2(-1.501,0.45) 3(-1.501,0) 4(-1.501,-0.45) 5(-1.501,-0.899) 11(1.501,-0.899) 12(1.501,-0.45) 13(1.501,0) 14(1.501,0.45) 15(1.501,0.899)
  oval 0.249x0.8 smd: 6(-0.899,-1.501) 7(-0.45,-1.501) 8(0,-1.501) 9(0.45,-1.501) 10(0.899,-1.501) 16(0.899,1.501) 17(0.45,1.501) 18(0,1.501) 19(-0.45,1.501) 20(-0.899,1.501)
  rect 1.001x1.001 hole 0.399: 21(0,0)
R0402
  rect 0.66x0.559 smd: 1(-0.559,0) 2(0.559,0)
R0603
  rect 0.899x1.001 smd: 1(-0.8,0) 2(0.8,0)
R0805
  rect 1.049x1.4 smd: 1(-0.95,0) 2(0.95,0)
R1206
  rect 1.524x2.032 smd: 1(-1.518,-0.01) 2(1.53,-0.01)
RCA-316
  round 2.4 hole 2.4: (-19.5,-0.851) (-10.749,-4.15) (10.749,-4.15) (19.5,-0.851)
  oval 1.801x3 hole 1.801x3: (-7.501,3.449) (7.501,3.449)
  oval 2.101x3.599 hole 0.8x3: 1(-15.001,4.15) 2(0,4.15) 3(15.001,4.15)
  oval 3x3.5 hole 2.299x2.601: 4(-15.001,-0.65) 5(0,-0.65) 6(15.001,-0.65)
RCLAMP0524P
  rect 0.201x0.676 smd: 1(0,-0.874) 2(0.5,-0.874) 4(1.501,-0.874) 5(1.999,-0.874) 6(1.999,0) 7(1.501,0) 9(0.5,0) 10(0,0)
  rect 0.399x0.671 smd: 3(1.001,-0.874) 8(1.001,0)
RJ-45B
  rect 1.1x1.369 hole 0.899: 1(3.564,-0.775)
  oval 1.1x1.369 hole 0.899: 2(2.543,1.006) 3(1.524,-0.775) 4(0.503,1.006) 5(-0.518,-0.775) 6(-1.537,1.006) 7(-2.558,-0.775) 8(-3.576,1.006)
  oval 1.801x3.5 hole 1.001x1.999: 9(-8.1,0.244) 10(8.1,0.244)
  round 3.299 hole 3.299: 11(-6.35,-3.315) 12(6.129,-3.315)
  oval 1.801x2.2 hole 1.199: 13(-6.868,5.814) 14(-4.577,5.814) 15(4.562,5.814) 16(6.853,5.814)
SOD123
  rect 1.524x1.27 smd: A(4.399,0.201) C(0.599,0.201)
SOP6P2_00B12_96X_22
  oval 1.539x2.741 smd: 1(-2.027,-6.109) 2(-4.026,-6.109) 3(-1.054,6.109) 4(2.423,6.109) 5(5.202,6.109) 6(-3.576,6.109)
SOP16P1_27B6_86X12_70H6_0
  oval 0.739x1.9 smd: 1(-4.445,-4.836) 2(-3.175,-4.836) 3(-1.905,-4.836) 4(-0.635,-4.836) 5(0.635,-4.836) 6(1.905,-4.836) 7(3.175,-4.836) 8(4.445,-4.836) 9(4.445,4.836) 10(3.175,4.836) 11(1.905,4.836) 12(0.635,4.836) 13(-0.635,4.836) 14(-1.905,4.836) 15(-3.175,4.836) 16(-4.445,4.836)
SOT23-5
  oval 1.199x0.549 smd: 1(-1.247,0.95) 2(-1.247,0) 3(-1.247,-0.95) 4(1.374,-0.95) 5(1.374,0.95)
SOT-23
  rect 0.899x0.8 smd: 1(-1.255,0.95) 2(-1.255,-0.95) 3(1.27,0)
SOT-223
  custom 1.102x1.702 smd: 1(-2.3,-3.15) 2(0,-3.15) 3(2.3,-3.15)
  rect 6x6 hole 0.203: 4(0,2.5)
SW3X4_2P
  round 0.7 hole 0.7 unplated: (0,-0.85) (0,0.85)
  rect 0.914x1.702 smd: 1(-2.05,0) 2(2.05,0)
SW4-SKQG-5_2X5_2H1_5B
  rect 1.5x1.05 smd: 1(-3,1.875) 2(3,1.875) 3(-3,-1.875) 4(3,-1.875)
SW_3P_DIP_SHORT
  round 1.3 hole 0.8: 1(-1.5,0.9) 2(1.5,0.9) 3(0,-0.9)
TF9P
  rect 1.501x2.2 smd: (-8.001,0.749) (8.001,0.749)
  round 0.899 hole 0.899 unplated: (-4.95,0) (3.051,0)
  rect 1.801x1.699 smd: (7.249,10.249) 10(-8.25,10)
  rect 0.701x1.6 smd: 1(2.2,10.899) 2(1.1,10.899) 3(0,10.899) 4(-1.1,10.899) 5(-2.2,10.899) 6(-3.299,10.899) 7(-4.399,10.899) 8(-5.499,10.899) 9(-6.599,10.899)
TP_SMD
  round 1.016 smd: 1(0,0)
TSOP-48
  rect 1.501x0.269 smd: 1(-10,5.751) 2(-10,5.25) 3(-10,4.75) 4(-10,4.249) 5(-10,3.749) 6(-10,3.251) 7(-10,2.751) 8(-10,2.25) 9(-10,1.75) 10(-10,1.25) 11(-10,0.749) 12(-10,0.249) 13(-10,-0.249) 14(-10,-0.749) 15(-10,-1.25) 16(-10,-1.75) 17(-10,-2.25) 18(-10,-2.751) 19(-10,-3.251) 20(-10,-3.749) 21(-10,-4.249) 22(-10,-4.75) 23(-10,-5.25) 24(-10,-5.751) 25(10,-5.751) 26(10,-5.25) 27(10,-4.75) 28(10,-4.249) 29(10,-3.749) 30(10,-3.251) 31(10,-2.751) 32(10,-2.25) 33(10,-1.75) 34(10,-1.25) 35(10,-0.749) 36(10,-0.249) 37(10,0.249) 38(10,0.749) 39(10,1.25) 40(10,1.75) 41(10,2.25) 42(10,2.751) 43(10,3.251) 44(10,3.749) 45(10,4.249) 46(10,4.75) 47(10,5.25) 48(10,5.751)
TSSOP14
  rect 1.999x0.351 smd: 1(-3.099,1.951) 2(-3.099,1.3) 3(-3.099,0.65) 4(-3.099,0) 5(-3.099,-0.65) 6(-3.099,-1.3) 7(-3.099,-1.951) 8(3.099,-1.951) 9(3.099,-1.3) 10(3.099,-0.65) 11(3.099,0) 12(3.099,0.65) 13(3.099,1.3) 14(3.099,1.951)
TVS0402
  rect 0.5x0.599 smd: 1(-0.45,0) 2(0.45,0)
unnamed
  round 5.588 hole 3.81: 1(0,0)
unnamed#2
  round 0.759 smd: (0,0)
unnamed#3
  round 2.413 hole 2.413 unplated: (0,0)
USB_A_1
  round 1.199 hole 0.701: 1(0,-5.999) 2(0,-4) 3(0,-1.999) 4(0,0)
  round 1.999 hole 1.4: 5(-2.901,0.5) 6(2.85,0.5) 7(-2.901,-6.5) 8(2.85,-6.5)
XH-2-2_54
  round 1.778 hole 0.914: 1(-1.27,0) 2(1.27,0)

## Nets
AGND: C32.1 C33.1 C34.1 C35.1 C37.1 C38.1 R7.1 R9.2 U1.U3(AGND)
AVCC: C37.2 C38.2 R6.2 R33.1 R34.1 R330.2 R344.1 U1.V3(AVCC)
GND: ANT2.2 C1.1 C2.2 C3.2 C4.1 C5.2 C6.1 C7.1 C8.2 C17.1 C18.1 C19.1 C20.1 C21.1 C22.1 C23.1 C24.1 C25.1 C26.1 C27.1 C28.1 C29.1 C30.1 C31.1 C36.1 C39.1 C40.1 C41.1 C42.2 C43.2 C45.2 C46.2 C47.1 C48.1 C49.1 C50.2 C51.2 C55.2 C57.2 C58.2 C62.1 C63.1 C67.1 C68.1 C69.1 C70.1 C71.1 C72.1 C75.1 C76.1 C77.1 C78.1 C79.1 C80.1 C81.1 C82.1 C83.1 C84.1 C85.1 C86.1 C87.1 C89.1 C90.2 C91.2 C92.2 C96.2 C97.1 C98.1 C101.1 C102.1 C103.2 C104.1 C105.2 C106.2 C108.2 C109.2 C121.1 C130.1 C170.2 C171.2 C172.2 C173.2 C175.1 C176.1 C177.1 C178.1 C179.1 C284.1 C285.2 C286.1 C289.1 C290.1 C291.1 C292.1 C293.1 C294.1 C296.2 C297.1 C298.1 C299.1 C300.1 C302.1 C303.2 C304.2 C305.1 C306.1 D1.2(CATHODE) D2.2(CATHODE) D3.2(CATHODE) D4.2(CATHODE) D5.2(CATHODE) D6.2(CATHODE) D7.2(CATHODE) D8.2(CATHODE) D9.2(CATHODE) D10.2(CATHODE) D11.2(CATHODE) D12.2(CATHODE) D13.2(CATHODE) D14.2(CATHODE) D15.1(ANODE) D16.1(ANODE) D17.1(ANODE) D18.2(CATHODE) D30.2(CATHODE) D40.2(CATHODE) D41.2(CATHODE) D42.2(CATHODE) D43.2(CATHODE) D44.2(CATHODE) D47.2(CATHODE) D48.A(1) DC2.1 DC3.1 DC4.1 DC5.1 DC6.1 DC7.1 DC8.1 DC9.1 DC10.1 DC11.1 DC12.1 DC13.1 DC14.1 DC15.1 DC16.1 DC17.1 DC18.1 DC19.1 DC20.1 DC21.1 DC22.1 DC23.1 DC24.1 DC25.1 DC27.1 DR1.1 DR2.1 DR3.1 DR4.1 DR5.2 DR7.1 DU1.A9(VSS#9) DU1.B1(VSSQ#1) DU1.B3(VSS#6) DU1.B9(VSSQ#7) DU1.D1(VSSQ#2) DU1.D8(VSSQ#5) DU1.E1(VSS#1) DU1.E2(VSSQ#4) DU1.E8(VSSQ#6) DU1.F9(VSSQ#8) DU1.G1(VSSQ#3) DU1.G8(VSS#7) DU1.G9(VSSQ#9) DU1.J2(VSS#5) DU1.J8(VSS#8) DU1.M1(VSS#2) DU1.M9(VSS#10) DU1.P1(VSS#3) DU1.P9(VSS#11) DU1.T1(VSS#4) DU1.T9(VSS#12) DU2.A9(VSS#9) DU2.B1(VSSQ#1) DU2.B3(VSS#6) DU2.B9(VSSQ#7) DU2.D1(VSSQ#2) DU2.D8(VSSQ#5) DU2.E1(VSS#1) DU2.E2(VSSQ#4) DU2.E8(VSSQ#6) DU2.F9(VSSQ#8) DU2.G1(VSSQ#3) DU2.G8(VSS#7) DU2.G9(VSSQ#9) DU2.J2(VSS#5) DU2.J8(VSS#8) DU2.M1(VSS#2) DU2.M9(VSS#10) DU2.P1(VSS#3) DU2.P9(VSS#11) DU2.T1(VSS#4) DU2.T9(VSS#12) ESD21.2(CATHODE) HCON1.2(G_D2) HCON1.5(G_D1) HCON1.8(G_D0) HCON1.11(G_CLK) HCON1.17(G_DDC/CEC) HCON1.20(SHIELD1) HCON1.21(SHIELD2) HCON1.22(SHIELD3) HCON1.23(SHIELD4) J1.2(GND0) J1.3(GND1) J2.6(VSS2) J2.10(GND) J4.3 J6.1 J6.2 J7.4 J7.5 J7.6 J9.2 J10.2(GND0) J10.3(GND1) OC1.2 P1.4(GND) P1.5(SHIELD1) P1.6(SHIELD2) P1.7(SHIELD3) P1.8(SHIELD4) P2.4(GND) P2.5(SHIELD1) P2.6(SHIELD2) P2.7(SHIELD3) P2.8(SHIELD4) Q5.2(E) Q8.2(E) Q9.2(E) R2.2 R9.1 R14.1 R18.1 R29.1 R54.1 R55.1 R56.1 R57.1 R58.1 R64.1 R66.2 R70.2 R97.1 R230.1 R232.1 R234.1 R308.2 R320.2 R321.2 R329.1 R340.1 R342.1 R343.1 SW1.2 SW2.2 U1.A21(GND0) U1.AA1(GND46) U1.G8(GND47) U1.H8(GND_TV) U1.H12(GND1) U1.H15(GND2) U1.J9(GND14) U1.J13(GND3) U1.J16(GND4) U1.K7(GND5) U1.K8(GND6) U1.K9(GND7) U1.K13(GND8) U1.K14(GND9) U1.K15(GND10) U1.K16(GND11) U1.L8(GND12) U1.L9(GND13) U1.L15(GND15) U1.M5(HGND) U1.M7(GND16) U1.M8(GND17) U1.M9(GND18) U1.M10(GND19) U1.M11(GND20) U1.M12(GND21) U1.M13(GND22) U1.M14(GND23) U1.M15(GND24) U1.N7(GND25) U1.N9(GND26) U1.N10(GND27) U1.N11(GND28) U1.N12(GND29) U1.N13(GND30) U1.N14(GND31) U1.N15(GND32) U1.P10(GND33) U1.P11(GND34) U1.P12(GND35) U1.P13(GND36) U1.P14(GND37) U1.P15(GND38) U1.R9(GND39) U1.R10(GND40) U1.R11(GND41) U1.R12(GND42) U1.R13(GND43) U1.R14(GND44) U1.T11(GND45) U3.1(GND) U4.2(GND) U5.1(GND) U7.2(GND) U8.2(GND) U10.AA4(VSSQ4) U10.AA6(VSSQ5) U10.K4(VSSQ1) U10.M7(VSS1) U10.P5(VSS2) U10.R10(VSS3) U10.U8(VSS6) U10.Y2(VSSQ2) U10.Y5(VSSQ3) U11.2(NC2) U11.13(VSS1) U11.23(NC8) U11.25(NC10) U11.36(VSS2) U11.48(NC22) U12.2(GND) U13.2(GND) U14.2(GND-RF) U14.6(GND) U15.1(+IN1) U15.4(SGND) U15.10(PGND) U15.14(+IN2) U19.3(GND1) U19.8(GND2) U20.3(GND1) U20.8(GND2) U21.2(GND) U31.7(GND1) U31.8(GND2) U31.18(GND3) U31.21(GND4) U48.2 U49.2(GND) U51.1 U52.1(GND) X2.2(GND1) X2.4(GND2) X3.2 X3.3(SHIELD) ZD1.A
GND-CPUFB: R2.1 TP2.1(TP) U1.T9(GND_CPUXFB)
PGND: C107.1 C108.1 C109.1 C287.1 C288.1 J8.9(SHIELD1) J8.10(SHIELD2)
VCC3V-PLL: C4.2 R33.2 U1.N3(VCC_PLL)
VCC3V-TV: C8.1 R34.2 U1.G9(V33_TV)
VCC-1V2: C56.2 C57.1 C58.1 C304.1 L2.2 R16.2 R21.1 R24.1
VCC-AV: C97.2 C98.2 FB1.1 R65.1 U15.9(PVDD)
VCC-DRAM: DC1.2 DC2.2 DC3.2 DC4.2 DC5.2 DC6.2 DC7.2 DC8.2 DC9.2 DC10.2 DC11.2 DC12.2 DC13.2 DC14.2 DC15.2 DC16.2 DC17.2 DC18.2 DC23.2 DC24.2 DC25.2 DC27.2 DR6.2 DU1.A1(VDDQ#1) DU1.A8(VDDQ#6) DU1.B2(VDD#3) DU1.C1(VDDQ#2) DU1.C9(VDDQ#9) DU1.D2(VDDQ#4) DU1.D9(VDD#7) DU1.E9(VDDQ#8) DU1.F1(VDDQ#3) DU1.G7(VDD#5) DU1.H2(VDDQ#5) DU1.H9(VDDQ#7) DU1.K2(VDD#4) DU1.K8(VDD#6) DU1.N1(VDD#1) DU1.N9(VDD#8) DU1.R1(VDD#2) DU1.R9(VDD#9) DU2.A1(VDDQ#1) DU2.A8(VDDQ#6) DU2.B2(VDD#3) DU2.C1(VDDQ#2) DU2.C9(VDDQ#9) DU2.D2(VDDQ#4) DU2.D9(VDD#7) DU2.E9(VDDQ#8) DU2.F1(VDDQ#3) DU2.G7(VDD#5) DU2.H2(VDDQ#5) DU2.H9(VDDQ#7) DU2.K2(VDD#4) DU2.K8(VDD#6) DU2.N1(VDD#1) DU2.N9(VDD#8) DU2.R1(VDD#2) DU2.R9(VDD#9) R10.2 U1.L16(VCC_DRAM0) U1.M16(VCC_DRAM1) U1.N16(VCC_DRAM2) U1.P16(VCC_DRAM3) U1.P17(VCC_DRAM4) U1.R16(VCC_DRAM5) U1.T12(VCC_DRAM6) U1.T13(VCC_DRAM7) U1.T14(VCC_DRAM8) U1.T15(VCC_DRAM9) U1.U11(VCC_DRAM10)
VCC-IO-EN: Q6.1(GATE) R234.2 U1.R2(PL5/S_JTAG_CK/S_PL_EINT5)
VCC-IR: C36.2 C39.2 J9.3 LED2.C- R3.1 R5.2 R25.2 R31.2 R32.2 R78.2 R79.2 R80.2 R227.2 R228.2 R328.2 U1.K6(VCC_RTC) U3.3(VIN)
VCC-WIFI: C89.2 C90.1 C170.1 Q4.3(DRAIN) U14.5(VCC)
VCC-WIFI-IO: C295.1 C296.1 Q4.2(SOURCE) R20.2 R226.2 R339.2
VDD1V1-EPHY: C7.2 R24.2 U1.F8(EPHY_VDD)
VDD1V2-SYS: C26.2 C27.2 C28.2 C29.2 C30.2 R21.2 U1.H10(VDD_SYS0) U1.J10(VDD_SYS2) U1.J11(VDD_SYS3) U1.J12(VDD_SYS4) U1.K10(VDD_SYS5) U1.K11(VDD_SYS6) U1.K12(VDD_SYS7) U1.L10(VDD_SYS1) U1.L11(VDD_SYS8) U1.L12(VDD_SYS9) U1.L13(VDD_SYS10) U1.L14(VDD_SYS11)
VDD-CPUFB: C174.2 R229.2 TP1.1(TP) U1.T10(VDD_CPUXFB)
VDD-CPUS: C5.1 C17.2 C18.2 U1.J7(VDD_CPUS0) U1.J8(VDD_CPUS1) U1.M4(RTC_VIO)
VDD-CPUX: C21.2 C22.2 C23.2 C24.2 C25.2 R231.2 U1.N8(VDD_CPUX0) U1.P6(VDD_CPUX1) U1.P7(VDD_CPUX2) U1.P8(VDD_CPUX3) U1.P9(VDD_CPUX4) U1.R6(VDD_CPUX5) U1.R7(VDD_CPUX6) U1.R8(VDD_CPUX7) U1.T6(VDD_CPUX8) U1.T7(VDD_CPUX9) U1.T8(VDD_CPUX10) U1.U6(VDD_CPUX11) U1.U9(VDD_CPUX12)
ANT: C88.2 U14.1(ANT)
AP-RESET#: C40.2 D47.1(ANODE) Q9.3(C) R5.1 U1.V6(RESET) U3.2(RESET_N)
AUDIO-L: D16.2(CATHODE) J7.3 R69.1
AUDIO-R: D15.2(CATHODE) J7.2 R62.1
CPUX-TCK: TP6.1(TP) U1.D5(PA1/UART2_RX/JTAG_CK0/PA_EINT1)
CPUX-TDI: TP5.1(TP) U1.E13(PA3/UART2_CTS/JTAG_DI0/PA_EINT3)
CPUX-TDO: TP7.1(TP) U1.D6(PA2/UART2_RTS/JTAG_DO0/PA_EINT2)
CPUX-TMS: TP8.1(TP) U1.D11(PA0/UART2_TX/JTAG_MS0/PA_EINT0)
CPUX-URX: Q3.2(SOURCE) R91.2 U1.H6(PA5/UART0_RX/PWM0/PA_EINT5)
CPUX-UTX: Q2.2(SOURCE) R90.1 U1.F5(PA4/UART0_TX/PA_EINT4)
EPHY-LINK-LED: C288.2 C289.2 J8.16(G-) U1.A2(EPHY_LINK_LED)
EPHY-RXN: U1.A4(EPHY_RXN) U22.8(RD-)
EPHY-RXP: U1.B4(EPHY_RXP) U22.6(RD+)
EPHY-SPD-LED: C287.2 C290.2 J8.14(Y-) U1.F7(EPHY_SPD_LED)
EPHY-TXN: U1.A3(EPHY_TXN) U22.3(TD-)
EPHY-TXP: U1.B3(EPHY_TXP) U22.1(TD+)
HCEC: Q7.2(SOURCE) R312.1 U1.G5(HCEC)
HDMI-3V: C1.2 C2.1 C6.2 C19.2 C20.2 C68.2 C69.2 C70.2 C71.2 C75.2 C76.2 C77.2 C78.2 C301.2 D45.A(1) FB1.2 Q2.1(GATE) Q3.1(GATE) Q7.1(GATE) R6.1 R11.2 R20.1 R35.1 R37.1 R38.1 R41.1 R50.1 R51.1 R52.1 R77.2 R83.1 R84.1 R91.1 R92.1 R99.1 R312.2 R341.1 U1.G7(EPHY_VCC) U1.G10(VDD_EFUSE) U1.G11(VCC-USB) U1.G13(VCC_IO0) U1.G14(VCC_IO1) U1.G15(VCC_IO2) U1.H7(VCC_PG) U1.H13(VCC_IO3) U1.H14(VCC_IO4) U1.J6(HVCC) U1.J14(VCC_IO5) U1.J15(VCC-PD) U10.AA3(VCCQ4) U10.AA5(VCCQ5) U10.K6(VCCQ1) U10.M6(VCC1) U10.N5(VCC2) U10.T10(VCC3) U10.U9(VCC4) U10.W4(VCCQ2) U10.Y4(VCCQ3) U11.1(RES#) U11.12(VCC1) U11.24(NC9) U11.34(NC15) U11.37(VCC2) U11.39(NC17)
HDMI-5V: D41.1(ANODE) D46.C(2) HCON1.18(+5V) R309.2 R310.2
HDMI-CEC: Q7.3(DRAIN) R306.2 R311.2
HHPD: R307.1 R308.1 U1.M2(HHPD)
HSCL: D44.1(ANODE) HCON1.15(SCL) R310.1 U1.H3(HSCL)
HSDA: D42.1(ANODE) HCON1.16(SDA) R309.1 U1.K3(HSDA)
HTX0N: HCON1.9(D0N) U1.F1(HTX0N) U20.2(IN2) U20.9(OUT2)
HTX0P: HCON1.7(D0P) U1.G1(HTX0P) U20.1(IN1) U20.10(OUT1)
HTX1N: HCON1.6(D1N) U1.G2(HTX1N) U19.5(IN4) U19.6(OUT4)
HTX1P: HCON1.4(D1P) U1.H2(HTX1P) U19.4(IN3) U19.7(OUT3)
HTX2N: HCON1.3(D2N) U1.J2(HTX2N) U19.2(IN2) U19.9(OUT2)
HTX2P: HCON1.1(D2P) U1.J1(HTX2P) U19.1(IN1) U19.10(OUT1)
HTXCN: HCON1.12(CLKN) U1.E2(HTXCN) U20.5(IN4) U20.6(OUT4)
HTXCP: HCON1.10(CLKP) U1.F2(HTXCP) U20.4(IN3) U20.7(OUT3)
IR-RX: ESD21.1(ANODE) J9.1 R80.1 U1.U2(PL11/S_CIR_RX/S_PL_EINT11) U21.1(OUT)
JTAG-SEL0: TP3.1(TP) U1.A1(JTAG_SEL0)
JTAG-SEL1: TP4.1(TP) U1.B2(JTAG_SEL)
LED1: J9.4 LED2.A2+ R322.1
LED2: J9.5 LED2.A1+ R323.1
LINEOUTL: C99.2 U1.AA3(LINEOUTL)
LINEOUTR: C94.2 U1.Y3(LINEOUTR)
MUTE: R63.1 U1.D15(PA16/SPI1_MISO/UART3_CTS/PA_EIN)
NALE: U1.C16(PC1/NAND_ALE/SPI0_MISO) U11.17(ALE)
NCE0: U1.F16(PC4/NAND_CE0) U11.9(CE1#)
NCE1: U1.B15(PC3/NAND_CE1/SPI0_CS) U11.10(CE2#)
NCLE: U1.B16(PC2/NAND_CLE/SPI0_CLK) U11.16(CLE)
NDQ0: R49.1 U1.B18(PC8/NAND_DQ0/SDC2_D0) U10.H3(DAT0) U11.29(IO0)
NDQ1: R48.1 U1.C17(PC9/NAND_DQ1/SDC2_D1) U10.H4(DAT1) U11.30(IO1)
NDQ2: R47.1 U1.D17(PC10/NAND_DQ2/SDC2_D2) U10.H5(DAT2) U11.31(IO2)
NDQ3: R46.1 U1.C18(PC11/NAND_DQ3/SDC2_D3) U10.J2(DAT3) U11.32(IO3)
NDQ4: U1.B17(PC12/NAND_DQ4/SDC2_D4) U10.J3(DAT4) U11.41(IO4)
NDQ5: U1.B19(PC13/NAND_DQ5/SDC2_D5) U10.J4(DAT5) U11.42(IO5)
NDQ6: U1.F17(PC14/NAND_DQ6/SDC2_D6) U10.J5(DAT6) U11.43(IO6)
NDQ7: U1.C19(PC15/NAND_DQ7/SDC2_D7) U10.J6(DAT7) U11.44(IO7)
NDQS: U1.H16(PC16/NAND_DQS/SDC2_RST) U10.U5(RESET) U11.35(NC16)
NRB0: R39.2 R41.2 R45.1 R341.2 U1.E16(PC6/NAND_RB0/SDC2_CMD) U10.W5(CMD) U11.7(RB1#)
NRB1: R35.2 R36.1 U1.A16(PC7/NAND_RB1) U11.4(RB4#) U11.5(RB3#)
NRBX: R36.2 R39.1 U11.6(RB2#)
NRE: R43.2 R44.1 U10.W6(CLK) U11.8(RE#)
NWE: U1.C15(PC0/NAND_WE/SPI0_MOSI) U11.18(WE#)
NWP: C72.2 R37.2 U11.19(WP#)
PWR-DRAM: R32.1 U1.M6(PL9/S_PL_EINT9) U4.1(EN)
PWR-LED: R324.1 R326.1 U1.V2(PL10/S_PWM/S_PL_EINT10)
PWR-STB: R31.1 U1.T2(PL8/S_PL_EINT8) U7.1(EN) U31.12(EN) U49.3(EN)
RECOVERY: R77.1 U1.N2(PL4/S_JTAG_MS/S_PL_EINT4) U48.1
S-TWI-SCK: R228.1 U1.N1(PL0/S_TWI_SCK/S_PL_EINT0) U31.9(SCL)
S-TWI-SDA: R227.1 U1.M1(PL1/S_TWI_SDA/S_PL_EINT1) U31.10(SDA)
SA0: DU1.N3(A0) DU2.N3(A0) U1.T17(SA0)
SA1: DU1.P7(A1) DU2.P7(A1) U1.U18(SA1)
SA2: DU1.P3(A2) DU2.P3(A2) U1.V19(SA2)
SA3: DU1.N2(A3) DU2.N2(A3) U1.V20(SA3)
SA4: DU1.P8(A4) DU2.P8(A4) U1.V21(SA4)
SA5: DU1.P2(A5) DU2.P2(A5) U1.Y19(SA5)
SA6: DU1.R8(A6) DU2.R8(A6) U1.Y20(SA6)
SA7: DU1.R2(A7) DU2.R2(A7) U1.V15(SA7)
SA8: DU1.T8(A8) DU2.T8(A8) U1.W18(SA8)
SA9: DU1.R3(A9) DU2.R3(A9) U1.Y18(SA9)
SA10: DU1.L7(A10) DU2.L7(A10) U1.P19(SA10)
SA11: DU1.R7(A11) DU2.R7(A11) U1.N19(SA11)
SA12: DU1.N7(A12) DU2.N7(A12) U1.R18(SA12)
SA13: DU1.T3(A13) DU2.T3(A13) U1.V12(SA13)
SA14: DU1.T7(A14) DU2.T7(A14) U1.N17(SA14)
SA15: DU1.M7(A15) DU2.M7(A15) U1.R17(SA15)
SBA0: DU1.M2(BA0) DU2.M2(BA0) U1.W17(SBA0)
SBA1: DU1.N8(BA1) DU2.N8(BA1) U1.T18(SBA1)
SBA2: DU1.M3(BA2) DU2.M3(BA2) U1.V17(SBA2)
SCAS: DU1.K3(CAS#) DU2.K3(CAS#) U1.U15(SCAS)
SCKE0: DU1.K9(CKE) DU2.K9(CKE) U1.AA21(SCKE0)
SCKE1: DU1.J9(CKE1) DU2.J9(CKE1) U1.Y21(SCKE1)
SCKN: DR8.1 DU1.K7(CK#) DU2.K7(CK#) U1.AA20(SCKB)
SCKP: DR8.2 DU1.J7(CK) DU2.J7(CK) U1.AA19(SCK)
SCS0: DU1.L2(CS#) DU2.L2(CS#) U1.W20(SCS0)
SCS1: DU1.L1(CS1#) DU2.L1(CS1#) U1.W21(SCS1)
SDC0-CLK: R53.1 U1.D20(PF2/SDC0_CLK/UART0_TX)
SDC0-CMD: D4.1(ANODE) J2.3(CMD) R51.2 U1.F18(PF3/SDC0_CMD/JTAG_DO0)
SDC0-D0: D6.1(ANODE) J2.7(DAT0) U1.A19(PF1/SDC0_D0/JTAG_DI0)
SDC0-D1: D7.1(ANODE) J2.8(DAT1) U1.D19(PF0/SDC0_D1/JTAG_MS0)
SDC0-D2: D2.1(ANODE) J2.1(DAT2) U1.C20(PF5/SDC0_D2/JTAG_CK0)
SDC0-D3: D3.1(ANODE) J2.2(DAT3) R54.2 U1.E21(PF4/SDC0_D3/UART0_RX)
SDC0-DET: D8.1(ANODE) J2.9(CD#) R52.2 U1.G18(PF6)
SDQ0: DU1.F8(DQL3) U1.N20(SDQ0)
SDQ1: DU1.H8(DQL5) U1.P21(SDQ1)
SDQ2: DU1.F7(DQL1) U1.P20(SDQ2)
SDQ3: DU1.E3(DQL0) U1.U21(SDQ3)
SDQ4: DU1.H7(DQL7) U1.R19(SDQ4)
SDQ5: DU1.F2(DQL2) U1.T20(SDQ5)
SDQ6: DU1.H3(DQL4) U1.U19(SDQ6)
SDQ7: DU1.G2(DQL6) U1.U20(SDQ7)
SDQ8: DU1.D7(DQU0) U1.J19(SDQ8)
SDQ9: DU1.C8(DQU2) U1.H20(SDQ9)
SDQ10: DU1.B8(DQU6) U1.H21(SDQ10)
SDQ11: DU1.A7(DQU4) U1.J21(SDQ11)
SDQ12: DU1.C3(DQU1) U1.L20(SDQ12)
SDQ13: DU1.C2(DQU3) U1.L21(SDQ13)
SDQ14: DU1.A2(DQU5) U1.M21(SDQ14)
SDQ15: DU1.A3(DQU7) U1.M19(SDQ15)
SDQ16: DU2.F8(DQL3) U1.Y17(SDQ16)
SDQ17: DU2.H8(DQL5) U1.AA17(SDQ17)
SDQ18: DU2.H7(DQL7) U1.Y16(SDQ18)
SDQ19: DU2.F7(DQL1) U1.W15(SDQ19)
SDQ20: DU2.E3(DQL0) U1.Y14(SDQ20)
SDQ21: DU2.G2(DQL6) U1.AA14(SDQ21)
SDQ22: DU2.H3(DQL4) U1.Y13(SDQ22)
SDQ23: DU2.F2(DQL2) U1.Y12(SDQ23)
SDQ24: DU2.C8(DQU2) U1.W12(SDQ24)
SDQ25: DU2.B8(DQU6) U1.AA11(SDQ25)
SDQ26: DU2.A7(DQU4) U1.Y11(SDQ26)
SDQ27: DU2.D7(DQU0) U1.Y10(SDQ27)
SDQ28: DU2.C3(DQU1) U1.W9(SDQ28)
